# Altium PCB PCB5.PcbDoc (part 2 of 4)
Units mil, origin at the board's own origin, x right, y up, seen from the top; angles counter-clockwise.
Board outline 1968.5 x 2362.2 mil, 4 copper layers (Top Layer, GND, VCC, Bottom Layer), stack 30.634 mil thick; 134 components, 248 nets, 1063 pads, 694 vias.
Unrouted connection lines stored in the file: 163.
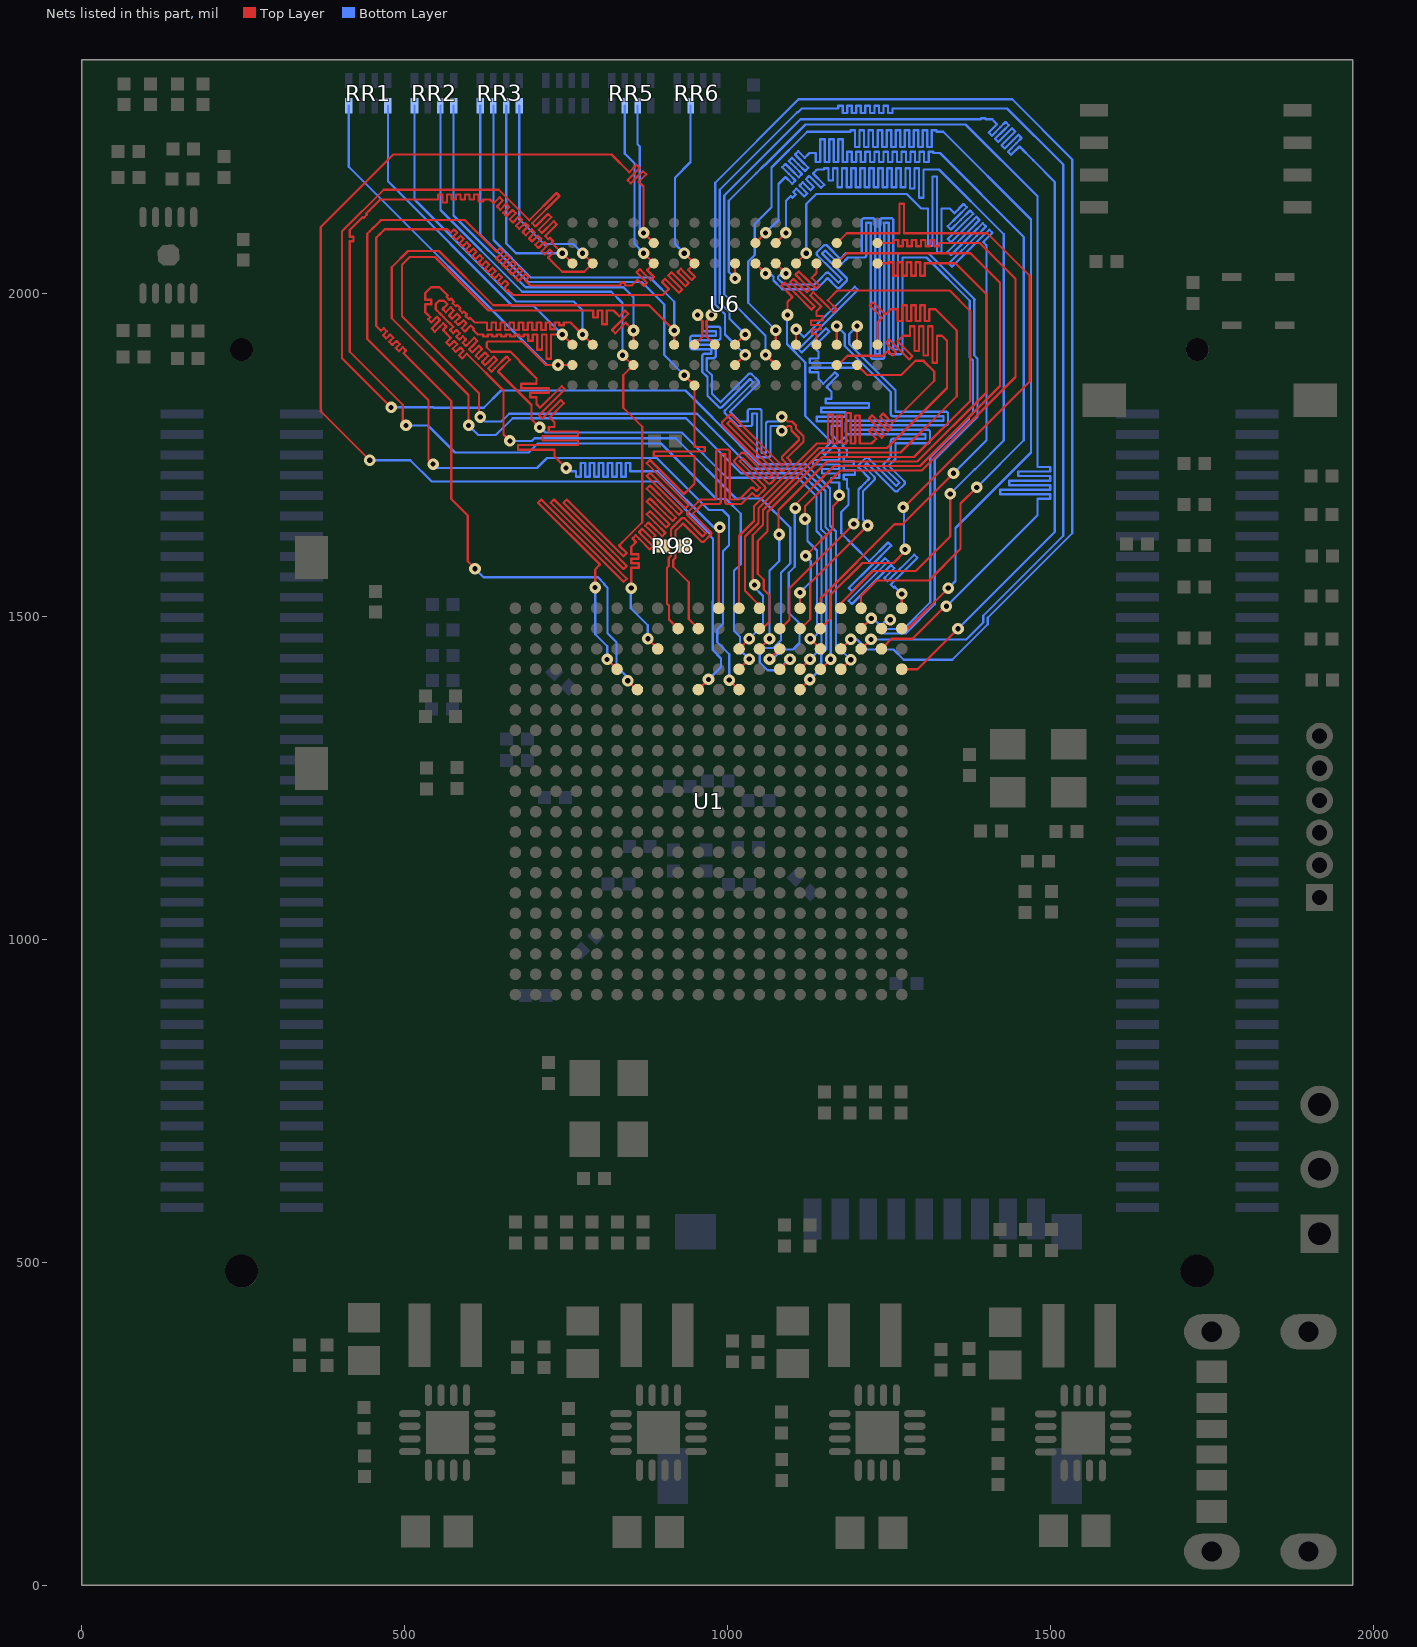
[diagram p4: the nets of this part, all layers, seen from the top]

## Via types
v1: diameter 18, hole 8, Top Layer to Bottom Layer, tented both sides, 692 vias
v2: diameter 40, hole 20, Top Layer to Bottom Layer, tented both sides, 2 vias

## Nets (pads, with @x,y where several pads share a name; then routed paths per layer and width w, separated by ;. In a path a pad name is that pad's centre, name@x,y a point inside that pad or via, vN(x,y) a via of type N, cw(c..) or ccw(c..) an arc to the next point about the centre after c; other vN are vias at no path point) (continued)
ADDR3-A8: RR1.8 U1.K1 U6.T8 | length 2210
  Top Layer w3.5: v1(750,1730) 741,1739 738.53,1741.47 733.58,1746.42 732,1748 732,1751.5 732,1758.5 675.68,1758.5 675.68,1765.5 732,1765.5 768.53,1765.5 768.53,1772.5 732,1772.5 713.56,1772.5 713.56,1779.5 732,1779.5 768.53,1779.5 768.53,1786.5 732,1786.5 723.25,1786.5 723.25,1793.5 732,1793.5 732,1800.5 732,1801 729.53,1803.47 724.58,1808.42 746.56,1830.41 741.61,1835.36 719.63,1813.37 712.94,1806.69 707.99,1811.64 714.68,1818.32 748.2,1851.85 743.25,1856.8 709.73,1823.27 704.78,1828.22 704,1829 704,1832.5 704,1839.5 694.4,1839.5 694.4,1846.5 704,1846.5 723.05,1846.5 723.05,1853.5 704,1853.5 680.4,1853.5 680.4,1860.5 704,1860.5 704,1867.5 704,1869 701.53,1871.47 696.58,1876.42 696.5,1876.5 678,1895 678,1896 664,1910 634,1910 627,1917 627,1923.95 629.05,1926 682,1926 718.49,1889.51 v1(737.51,1889.51) U6.T8@759.78,1889.51 ; U1.K1@986.45,1512.85 986.45,1636.45 v1(988,1638)
  Bottom Layer w3.5: RR1.8@413.37,2291 413.37,2196.63 720.49,1889.51 v1(737.51,1889.51) ; v1(750,1730) 755,1725 758.5,1725 765.5,1725 765.5,1716.52 772.5,1716.52 772.5,1725 772.5,1737.98 779.5,1737.98 779.5,1725 779.5,1716.52 786.5,1716.52 786.5,1725 786.5,1737.98 793.5,1737.98 793.5,1725 793.5,1716.52 800.5,1716.52 800.5,1725 800.5,1737.98 807.5,1737.98 807.5,1725 807.5,1716.52 814.5,1716.52 814.5,1725 814.5,1737.98 821.5,1737.98 821.5,1725 821.5,1716.52 828.5,1716.52 828.5,1725 828.5,1737.98 835.5,1737.98 835.5,1725 835.5,1716.52 842.5,1716.52 842.5,1725 842.5,1737.98 849.5,1737.98 849.5,1725 892,1725 979,1638 v1(988,1638)
ADDR3-A9: RR3.5 U1.J4 U6.R3 | length 2291.2
  Top Layer w3.5: v1(502,1796) 501,1796 497,1800 497,1828 415,1910 415,2081.2 420.68,2081.2 420.68,2088.2 415,2088.2 415,2095.2 415,2098.7 435.07,2118.78 436.5,2117.35 441.45,2122.3 440.02,2123.73 444.97,2128.68 449.92,2133.63 454.87,2138.58 459.82,2143.53 462.3,2146 551.5,2146 551.5,2153.68 558.5,2153.68 558.5,2146 558.5,2141.32 565.5,2141.32 565.5,2146 565.5,2153.68 572.5,2153.68 572.5,2146 579.5,2146 579.5,2153.68 586.5,2153.68 586.5,2146 593.5,2146 593.5,2153.68 600.5,2153.68 600.5,2146 607.5,2146 607.5,2153.68 614.5,2153.68 614.5,2146 614.5,2142.89 621.5,2142.89 621.5,2146 628.5,2146 632,2146 632.98,2145.02 637.93,2140.07 647.14,2149.28 652.09,2144.33 642.88,2135.12 647.83,2130.17 657.04,2139.38 661.99,2134.43 652.78,2125.22 657.73,2120.27 666.94,2129.48 671.89,2124.53 662.68,2115.32 667.63,2110.37 676.84,2119.58 681.79,2114.63 672.58,2105.42 677.53,2100.47 686.74,2109.68 691.69,2104.73 682.48,2095.52 687.43,2090.57 696.64,2099.78 701.59,2094.83 692.38,2085.62 697.33,2080.67 706.54,2089.88 711.49,2084.93 702.28,2075.72 707.23,2070.77 716.44,2079.98 721.39,2075.03 712.18,2065.82 717.13,2060.87 724.63,2068.38 729.58,2063.43 722.08,2055.92 727.03,2050.97 729.5,2048.5 744,2034 744,2033.87 778.15,2033.87 U6.R3@791.28,2046.99 v1(775.53,2062.74) ; U1.J4@1017.85,1418.35 v1(1033.6,1434.1)
  Bottom Layer w3.5: v1(502,1796) 536,1796 578,1754 692,1754 706,1768 897,1768 983,1682 997.7,1682 1020.35,1659.35 1020.35,1581.15 1010,1570.8 1010,1478 1019.35,1468.65 1019.35,1448.35 v1(1033.6,1434.1) ; RR3.5@677.6,2291 677.6,2115.4 717.01,2075.99 718.01,2076.99 761.28,2076.99 v1(775.53,2062.74)
ADDR3-A10: RR3.7 U1.F5 U6.L7 | length 2323.6
  Top Layer w3.5: v1(599,1796) 599,1843 480,1962 480,2041 505,2066 553,2066 637,1982 878.55,1982 v1(917.45,1943.1) U6.L7@917.45,1920.83 ; U1.F5@1111.85,1386.65 v1(1127.6,1402.4)
  Bottom Layer w3.5: v1(599,1796) 614,1781 641,1781 667.25,1807.25 935.75,1807.25 1021,1722 1114.1,1722 1144.75,1691.35 1144.75,1635.3 1152.75,1627.3 1152.75,1448.85 1145,1441.1 1145,1419.8 v1(1127.6,1402.4) ; v1@599,1796.75 v1@599.38,1796.38 ; RR3.7@637.44,2291 637.44,2083 695.44,2025 880,2025 917.45,1987.55 v1(917.45,1943.1)
ADDR3-A11: RR2.8 U1.G4 U6.R7 | length 2260.8
  Top Layer w3.5: v1(663,1772) 653,1782 653,1850 596.17,1906.83 589.13,1899.78 584.18,1904.73 591.22,1911.78 586.27,1916.73 579.23,1909.68 574.28,1914.63 581.32,1921.68 576.37,1926.63 569.33,1919.58 564.38,1924.53 571.42,1931.58 566.47,1936.53 564,1939 563.62,1939.38 559.22,1943.78 564.77,1949.33 559.83,1954.28 554.27,1948.73 546.72,1941.17 541.77,1946.12 549.32,1953.68 554.88,1959.23 549.93,1964.18 544.37,1958.63 541.32,1955.57 536.37,1960.52 539.42,1963.58 534.47,1968.53 532,1971 532,1976.5 532,1983.5 541,1983.5 541,1990.5 532,1990.5 532,1997.5 532,2001 533.58,2002.58 538.53,2007.53 541,2010 543.5,2010 550.5,2010 554,2010 556.74,2007.26 561.69,2002.31 566.64,1997.36 564.59,1995.31 569.54,1990.36 571.59,1992.41 576.54,1987.46 574.49,1985.41 579.44,1980.46 581.49,1982.51 586.44,1977.56 584.39,1975.51 589.34,1970.56 591.39,1972.61 596.34,1967.66 594.29,1965.61 599.24,1960.66 601.29,1962.71 606.24,1957.76 608.72,1955.28 613.5,1955.28 620.5,1955.28 627.5,1955.28 627.5,1943.76 634.5,1943.76 634.5,1955.28 641.5,1955.28 641.5,1943.76 648.5,1943.76 648.5,1955.28 655.5,1955.28 655.5,1943.76 662.5,1943.76 662.5,1955.28 669.5,1955.28 669.5,1943.76 676.5,1943.76 676.5,1955.28 683.5,1955.28 683.5,1943.76 690.5,1943.76 690.5,1955.28 697.5,1955.28 697.5,1943.76 704.5,1943.76 704.5,1955.28 711.5,1955.28 711.5,1943.76 718.5,1943.76 718.5,1955.28 725.5,1955.28 725.5,1945.13 732.5,1945.13 732.5,1955.28 739.5,1955.28 739.5,1951.01 746.5,1951.01 746.5,1955.28 753.5,1955.28 757,1955.28 758.84,1953.45 763.79,1948.5 766.26,1946.02 v1(775.53,1936.76) U6.R7@791.28,1921.01 ; U1.G4@1081,1418 v1(1096.75,1433.75)
  Bottom Layer w3.5: RR2.8@515.17,2291 515.17,2145.83 673,1988 762,1988 775.53,1974.47 v1(775.53,1936.76) ; v1(663,1772) 697,1772 701,1776 920,1776 1013,1683 1052,1683 1097,1638 1097,1582 1082.95,1567.95 1082.95,1463.3 1071,1451.35 1056.35,1451.35 1050,1445 1050,1429.05 1062.05,1417 1078,1417 1094.75,1433.75 v1(1096.75,1433.75)
ADDR3-A12: RR2.5 U1.E4 U6.N7 | length 2285.4
  Top Layer w3.5: v1(617,1809) 615,1811 615,1846 496,1965 496,2045 508,2057 547,2057 630,1974 792.06,1974 792.06,1963.16 799.06,1963.16 799.06,1974 806.06,1974 806.06,1952.55 813.06,1952.55 813.06,1974 820.06,1974 823.56,1974 827.46,1970.1 832.41,1965.15 841.16,1973.91 846.11,1968.96 837.36,1960.2 821.03,1943.88 825.98,1938.93 842.31,1955.26 844.78,1952.78 v1(854.46,1943.1) U6.N7@854.46,1920.83 ; U1.E4@1144,1418 v1(1159.75,1433.75)
  Bottom Layer w3.5: RR2.5@575.8,2291 575.8,2121.2 687,2010 839,2010 854.46,1994.54 v1(854.46,1943.1) ; v1(617,1809) 624,1802 649.75,1802 662,1814.25 952.75,1814.25 1038,1729 1117,1729 1151.75,1694.25 1151.75,1638.2 1159.75,1630.2 v1(1159.75,1433.75)
ADDR3-A13: RR3.6 U1.D4 U6.T3 | length 2328.7
  Top Layer w3.5: v1(479,1824) 403,1900 403,2096.6 467.4,2161 645.77,2161 692.81,2113.96 734.96,2156.11 739.91,2151.16 697.76,2109.01 702.71,2104.06 722.11,2123.46 727.06,2118.51 707.66,2099.11 712.61,2094.16 730.76,2112.3 735.71,2107.35 717.56,2089.21 722.51,2084.26 724.96,2086.71 729.91,2081.76 727.46,2079.31 732.41,2074.36 734.89,2071.89 v1(744.03,2062.74) U6.T3@759.78,2046.99 ; U1.D4@1175.05,1417.35 v1(1190.8,1433.1)
  Bottom Layer w3.5: v1(479,1824) 544.25,1824 545,1823.25 622.49,1823.25 649.23,1849.99 849.84,1849.99 850.1,1850.25 891.41,1850.25 891.67,1849.99 935.01,1849.99 1018.75,1766.25 1018.75,1765.51 1048.26,1736 1121,1736 1158.75,1698.25 1158.75,1641.1 1168,1631.85 1168,1455.9 v1(1190.8,1433.1) ; RR3.6@657.13,2291 657.13,2077.87 672.26,2062.74 v1(744.03,2062.74)
ADDR3-A14: RR1.5 U1.F4 U6.T7 | length 2232.6
  Top Layer w3.5: v1(709,1793) 696.5,1805.5 696.5,1827.5 651.5,1872.5 644.52,1879.48 662.65,1897.61 657.7,1902.56 639.57,1884.43 634.46,1879.32 629.51,1884.27 634.62,1889.38 642.85,1897.61 637.9,1902.56 629.67,1894.33 624.56,1889.22 619.61,1894.17 624.72,1899.28 629.33,1903.89 624.38,1908.84 619.77,1904.23 614.66,1899.12 609.71,1904.07 614.82,1909.18 619.94,1914.3 614.99,1919.25 609.87,1914.13 604.76,1909.02 599.81,1913.97 604.92,1919.08 612.53,1926.69 607.59,1931.64 599.97,1924.03 594.86,1918.92 589.91,1923.86 595.02,1928.98 590.07,1933.93 584.96,1928.81 580.01,1933.76 585.12,1938.88 580.17,1943.83 575.06,1938.71 570.11,1943.66 575.22,1948.78 570.27,1953.73 565.32,1958.68 560.37,1963.63 555.42,1968.58 550.47,1973.53 548,1976 548,1984 553,1989 561,1989 561.27,1988.73 566.22,1983.78 558.61,1976.17 563.56,1971.22 571.17,1978.83 576.12,1973.88 568.51,1966.27 573.46,1961.32 581.07,1968.93 586.02,1963.98 578.41,1956.37 583.36,1951.42 590.97,1959.03 595.92,1954.08 588.31,1946.47 593.25,1941.52 600.87,1949.13 602.48,1950.74 607.43,1945.8 605.82,1944.18 610.77,1939.23 613.24,1936.76 614.5,1936.76 621.5,1936.76 621.5,1933.6 628.5,1933.6 628.5,1936.76 635.5,1936.76 635.5,1933.62 642.5,1933.62 642.5,1936.76 649.5,1936.76 649.5,1933.62 656.5,1933.62 656.5,1936.76 663.5,1936.76 663.5,1933.62 670.5,1933.62 670.5,1936.76 677.5,1936.76 677.5,1933.62 684.5,1933.62 684.5,1936.76 691.5,1936.76 691.5,1927.02 698.5,1927.02 698.5,1936.76 705.5,1936.76 705.5,1913.02 712.5,1913.02 712.5,1936.76 719.5,1936.76 719.5,1899.18 726.5,1899.18 726.5,1936.76 730,1936.76 v1(744.03,1936.76) U6.T7@759.78,1921.01 ; U1.F4@1112,1418 v1(1127.75,1433.75)
  Bottom Layer w3.5: RR1.5@474,2291 474,2174 667,1981 699.79,1981 v1(744.03,1936.76) ; v1(709,1793) 710,1793 718,1785 929,1785 999,1715 1109,1715 1137.75,1686.25 1137.75,1632.4 1145.75,1624.4 1145.75,1451.75 v1(1127.75,1433.75)
ADDR3-BA0: RR5.6 U1.L5 U6.M2 | length 2175.9
  Top Layer w3.5: v1(446,1742) 370,1818 370,2103.2 482.3,2215.5 820.5,2215.5 847.74,2188.26 859.21,2199.73 864.16,2194.78 852.69,2183.31 845.25,2175.87 850.2,2170.92 857.64,2178.36 869.11,2189.83 874.06,2184.88 862.59,2173.41 867.54,2168.46 870.01,2165.99 v1(870.01,2094.24) U6.M2@885.76,2078.49 ; U1.L5@954.85,1386.85 v1(970.6,1402.6)
  Bottom Layer w3.5: v1@446,1742.25 508.75,1742.25 542,1709 892,1709 973.75,1627.25 973.75,1624.51 977.7,1620.56 977.7,1524.87 977,1524.17 977,1448 990,1435 990,1421.8 v1@972.2,1404 ; RR5.6@860.73,2291 860.73,2231.27 864,2228 864,2100.25 v1(870.01,2094.24)
ADDR3-BA1: RR2.6 U1.R4 U6.N8 | length 2055.6
  Top Layer w3.5: v1(795,1545) 795,1559 795,1562.5 795,1569.5 795,1573 797.47,1575.47 802.42,1580.42 706.53,1676.31 711.48,1681.26 807.37,1585.37 839.05,1553.69 844,1558.64 812.32,1590.32 726.33,1676.31 731.28,1681.26 817.27,1595.27 839.05,1573.49 844,1578.44 822.22,1600.22 746.13,1676.31 751.08,1681.26 827.17,1605.17 839.05,1593.29 844,1598.24 832.12,1610.12 837.07,1615.07 868,1646 868,1794 838.52,1823.48 838.52,1828 838.52,1873.76 U6.N8@854.27,1889.51 ; v1(813.6,1433.6) U1.R4@829.35,1417.85 ; v1(837.52,1904.76) U6.N8@853.27,1889.01
  Bottom Layer w3.5: RR2.6@555.33,2291 555.33,2129.67 682,2003 820,2003 837.52,1985.48 v1(837.52,1904.76) ; v1(795,1545) 795,1472.45 813.6,1453.85 v1(813.6,1433.6)
ADDR3-BA2: RR5.7 U1.J5 U6.M3 | length 2191.6
  Top Layer w3.5: v1(544,1736) 537,1743 537,1835 442,1930 442,2021 442,2026.2 442,2033.2 442,2040.2 442,2047.2 442,2054.2 442,2061.2 442,2068.2 442,2075.2 442,2082.2 442,2089.2 442,2092.7 445.98,2096.68 450.93,2101.63 455.88,2106.58 460.83,2111.53 463.3,2114 463.5,2114 470.5,2114 477.5,2114 484.5,2114 491.5,2114 498.5,2114 505.5,2114 512.5,2114 519.5,2114 526.5,2114 533.5,2114 540.5,2114 547.5,2114 554.5,2114 561.5,2114 568.5,2114 575.5,2114 582.5,2114 589.5,2114 593,2114 642.16,2064.84 647.71,2070.39 652.66,2065.44 647.11,2059.89 641.56,2054.34 646.51,2049.39 652.06,2054.94 657.61,2060.49 662.56,2055.54 657.01,2049.99 651.46,2044.44 656.41,2039.49 661.96,2045.04 667.51,2050.59 672.46,2045.64 666.91,2040.09 661.36,2034.54 666.31,2029.59 671.86,2035.14 677.41,2040.69 682.36,2035.74 676.81,2030.19 671.26,2024.64 676.21,2019.69 681.76,2025.24 687.31,2030.79 692.26,2025.84 686.71,2020.29 691.66,2015.34 694.13,2012.87 701.14,2012.87 708.14,2012.87 715.14,2012.87 722.14,2012.87 729.14,2012.87 736.14,2012.87 743.14,2012.87 750.14,2012.87 757.14,2012.87 764.14,2012.87 771.14,2012.87 778.14,2012.87 785.14,2012.87 792.14,2012.87 799.14,2012.87 806.14,2012.87 813.14,2012.87 820.14,2012.87 827.14,2012.87 834.14,2012.87 834.14,2016.97 841.14,2016.97 841.14,2012.87 848.14,2012.87 851.64,2012.87 855.61,2016.84 860.56,2021.79 870.35,2012 875.3,2016.95 865.51,2026.74 859.04,2033.21 863.99,2038.16 870.46,2031.69 881.26,2020.89 886.21,2025.84 875.41,2036.64 877.89,2039.11 U6.M3@885.76,2046.99 v1(870.01,2062.74) ; v1(1002.6,1401.6) U1.J5@1018.35,1385.85
  Bottom Layer w3.5: v1(544,1736) 550,1730 705,1730 720.5,1745.5 890.24,1745.5 970.87,1664.87 992.23,1664.87 1002.25,1654.85 1002.25,1610.25 993,1601 993,1489 984,1480 984,1460 1002.6,1441.4 v1(1002.6,1401.6) ; RR5.7@841.04,2291 841.04,2216.96 855.76,2202.24 855.76,2077.24 870.01,2062.99 v1(870.01,2062.74)
ADDR3-CAS: RR6.7 U1.P5 U6.K3 | length 2202.8
  Top Layer w3.5: v1(609,1574) 597.5,1585.5 597.5,1656.5 572,1682 572,1834 498.07,1907.93 502.12,1911.97 497.17,1916.92 493.12,1912.88 491.08,1910.83 486.13,1915.78 488.17,1917.83 492.22,1921.87 487.27,1926.82 483.22,1922.78 481.18,1920.73 476.23,1925.68 478.27,1927.73 482.32,1931.77 477.37,1936.72 473.32,1932.68 471.28,1930.63 466.33,1935.58 468.37,1937.63 472.42,1941.67 467.47,1946.62 463.42,1942.58 458.47,1947.53 456,1950 456,1950.4 456,1957.4 456,1964.4 456,1971.4 456,1978.4 456,1985.4 456,1992.4 456,1999.4 456,2006.4 456,2013.4 456,2020.4 456,2027.4 456,2034.4 456,2041.4 456,2048.4 456,2055.4 456,2062.4 456,2069.4 456,2076.4 456,2083.4 456,2086.9 456.73,2087.63 461.68,2092.58 466.63,2097.53 469.1,2100 471.5,2100 478.5,2100 485.5,2100 492.5,2100 499.5,2100 506.5,2100 513.5,2100 520.5,2100 527.5,2100 534.5,2100 541.5,2100 548.5,2100 555.5,2100 562.5,2100 566,2100 566.53,2099.47 571.48,2094.52 576.53,2099.57 581.48,2094.62 576.43,2089.57 574.88,2088.02 579.83,2083.07 581.38,2084.62 586.43,2089.67 591.38,2084.72 586.33,2079.67 584.78,2078.12 589.73,2073.18 591.28,2074.72 596.33,2079.77 601.27,2074.82 596.23,2069.77 594.68,2068.23 599.63,2063.28 601.18,2064.82 606.22,2069.87 611.17,2064.92 606.13,2059.87 604.58,2058.33 609.53,2053.38 611.08,2054.92 616.12,2059.97 621.07,2055.02 616.03,2049.97 614.48,2048.43 619.43,2043.48 620.98,2045.02 626.02,2050.07 630.97,2045.12 625.93,2040.07 624.38,2038.53 629.33,2033.58 630.88,2035.12 635.92,2040.17 640.87,2035.22 635.83,2030.17 634.28,2028.63 639.23,2023.68 640.78,2025.22 645.82,2030.27 650.77,2025.32 645.73,2020.27 644.18,2018.73 649.13,2013.78 650.68,2015.32 655.72,2020.37 660.67,2015.42 655.63,2010.37 654.08,2008.83 659.03,2003.88 660.58,2005.42 665.53,2000.47 668,1998 672.26,1998 679.26,1998 686.26,1998 693.26,1998 700.26,1998 707.26,1998 714.26,1998 721.26,1998 728.26,1998 735.26,1998 742.26,1998 749.26,1998 756.26,1998 763.26,1998 770.26,1998 777.26,1998 784.26,1998 791.26,1998 798.26,1998 805.26,1998 812.26,1998 819.26,1998 826.26,1998 833.26,1998 840.26,1998 847.26,1998 854.26,1998 861.26,1998 868.26,1998 875.26,1998 882.26,1998 889.26,1998 896.26,1998 899.76,1998 904.26,2002.49 909.21,2007.44 898.41,2018.24 903.36,2023.19 914.16,2012.39 924.95,2001.6 929.9,2006.55 919.11,2017.34 908.31,2028.14 913.26,2033.09 924.06,2022.29 934.85,2011.5 939.8,2016.45 929.01,2027.24 922.54,2033.71 927.49,2038.66 933.96,2032.19 944.75,2021.4 949.7,2026.35 938.91,2037.14 941.38,2039.62 U6.K3@948.76,2046.99 v1(933.01,2062.74) ; v1(845.6,1400.6) U1.P5@861.35,1384.85
  Bottom Layer w3.5: v1(609,1574) 622.25,1560.75 799.4,1560.75 809.25,1550.91 809.25,1549.49 814,1544.74 814,1474 828,1460 828,1423 845.6,1405.4 v1(845.6,1400.6) ; v1(933.01,2062.74) 918.76,2076.99 918.76,2179.76 942.84,2203.84 RR6.7@942.84,2291
ADDR3-CKE0: RR3.8 U1.N3 U6.K9 | length 2112.3
  Top Layer w3.5: v1(851,1544) 851,1565 851,1568.5 851,1575.5 862.48,1575.5 862.48,1582.5 851,1582.5 851,1589.5 861.97,1589.5 861.97,1596.5 851,1596.5 851,1603.5 851,1608 853.47,1610.47 858.42,1615.42 852.87,1620.98 857.82,1625.93 863.37,1620.37 879.75,1604 884.7,1608.95 868.32,1625.32 862.77,1630.88 867.72,1635.83 873.27,1630.27 883.51,1620.03 888.46,1624.98 878.22,1635.22 872.67,1640.77 877.62,1645.72 883.17,1640.17 899.06,1624.29 904.01,1629.24 888.12,1645.12 875,1658.25 879.95,1663.2 893.07,1650.07 905.15,1638 910.1,1642.95 898.02,1655.02 875,1678.05 879.95,1683 902.97,1659.97 915.05,1647.9 920,1652.85 907.92,1664.92 875,1697.85 879.95,1702.8 912.87,1669.87 925.04,1657.7 929.99,1662.65 917.82,1674.82 875,1717.64 879.95,1722.59 922.77,1679.77 934.85,1667.69 939.8,1672.64 927.72,1684.72 875,1737.44 879.95,1742.39 932.67,1689.67 933.5,1690.5 939.5,1696.5 948.76,1705.76 948.76,1709 948.76,1723.5 948.76,1727 948.76,1734 948.76,1738 948.76,1741.5 948.76,1748.5 885.87,1748.5 885.87,1755.5 948.76,1755.5 964.6,1755.5 964.6,1762.5 948.76,1762.5 948.76,1807 U6.K9@948.76,1858.02 v1(933.01,1873.77) ; v1(876.6,1465.6) U1.N3@892.35,1449.85
  Bottom Layer w3.5: RR3.8@616.97,2291 616.97,2092.03 691,2018 867,2018 901.89,1983.11 901.89,1904.89 v1(933.01,1873.77) ; v1(851,1544) 850,1543 850,1513 876.6,1486.4 v1(876.6,1465.6)
ADDR3-CLK0_N: R98.2 U1.M2 U6.K7 | length 1746.2
  Top Layer w3.5: U1.M2@923.45,1481.35 909.2,1495.6 909.2,1517 906.2,1520 906.2,1575.6 909.12,1578.53 909.12,1590.64 912.62,1594.14 912.62,1598.66 910.57,1600.71 908.27,1600.71 R98.2@899.98,1609 908.27,1617.29 910.57,1617.29 912.62,1619.34 912.62,1635.57 928.71,1651.66 cw(c931.19,1649.19) 933.66,1651.66 961.36,1623.96 966.31,1628.91 938.61,1656.61 cw(c941.09,1659.09) 938.61,1661.56 948.51,1671.46 958.26,1681.21 982.46,1681.21 982.46,1755.07 cw(c985.96,1755.07) 985.96,1758.57 999.96,1758.57 cw(c999.96,1755.07) 1003.46,1755.07 1003.46,1681.21 1018.21,1681.21 1025.85,1688.85 1035.74,1698.74 cw(c1038.22,1696.27) 1040.69,1698.75 1044.98,1694.47 1049.93,1699.42 1011.49,1737.86 cw(c1013.96,1740.34) 1011.48,1742.81 1021.38,1752.71 cw(c1023.86,1750.23) 1026.33,1752.71 1064.77,1714.27 1069.72,1719.22 992.32,1796.63 cw(c994.79,1799.11) 992.31,1801.58 1002.21,1811.48 cw(c1004.69,1809) 1007.16,1811.48 1080.29,1738.35 1084.57,1734.07 1089.52,1739.02 1085.25,1743.29 cw(c1087.72,1745.77) 1085.24,1748.24 1110.55,1773.55 1110.55,1776.45 1098.95,1788.05 1098.95,1792.95 1096.9,1795 1093.3,1795 1086.05,1787.75 v1(1084,1787.75) ; U6.K7@948.76,1921.01 961,1933.26 961,1957.7 953.75,1964.95 v1(953.75,1967)
  Bottom Layer w3.5: v1(953.75,1967) 953.75,1964.95 961,1957.7 961,1945.45 ccw(c964.5,1945.45) 964.5,1941.95 982,1941.95 982,1934.95 945.91,1934.95 ccw(c945.91,1931.45) 942.41,1931.45 942.41,1917.45 ccw(c945.91,1917.45) 945.91,1913.95 974.75,1913.95 974.75,1906.95 964.5,1906.95 ccw(c964.5,1903.45) 961,1903.45 961,1878.71 968.86,1870.86 968.86,1842.14 986.51,1824.49 ccw(c988.99,1826.96) 991.46,1824.48 1034.96,1867.98 1039.91,1863.03 996.42,1819.54 ccw(c998.89,1817.06) 996.41,1814.59 1006.31,1804.69 1016,1795 1035,1795 ccw(c1035,1798.5) 1038.5,1798.5 1038.5,1814.49 1045.5,1814.49 1045.5,1750.11 ccw(c1049,1750.11) 1049,1746.61 1063,1746.61 ccw(c1063,1750.11) 1066.5,1750.11 1066.5,1795 1081.95,1795 1081.95,1789.8 v1(1084,1787.75)
ADDR3-CLK0_P: R98.1 U1.L2 U6.J7 | length 1753.8
  Top Layer w3.5: U1.L2@954.85,1481.35 940,1496.2 940,1553.15 916.12,1577.03 916.12,1587.74 919.62,1591.24 919.62,1598.66 921.67,1600.71 923.98,1600.71 R98.1@932.27,1609 923.98,1617.29 921.67,1617.29 919.62,1619.34 919.62,1632.67 927.47,1640.52 931.19,1644.24 958.88,1616.54 ccw(c961.36,1619.01) 963.83,1616.53 973.73,1626.43 ccw(c971.26,1628.91) 974.76,1628.91 ccw(c971.26,1628.91) 973.74,1631.38 946.03,1659.09 953.46,1666.51 961.16,1674.21 985.96,1674.21 ccw(c985.96,1677.71) 989.46,1677.71 989.46,1751.57 996.46,1751.57 996.46,1677.71 ccw(c999.96,1677.71) 999.96,1674.21 1021.11,1674.21 1030.79,1683.9 1038.22,1691.32 1042.5,1687.05 ccw(c1044.98,1689.52) 1047.45,1687.04 1057.35,1696.94 ccw(c1054.87,1699.42) 1058.37,1699.42 ccw(c1054.87,1699.42) 1057.35,1701.89 1018.91,1740.34 1023.86,1745.29 1062.3,1706.85 ccw(c1064.77,1709.32) 1067.25,1706.84 1077.15,1716.74 ccw(c1074.67,1719.22) 1078.17,1719.22 ccw(c1074.67,1719.22) 1077.15,1721.69 999.74,1799.11 1004.69,1804.06 1075.34,1733.4 1082.09,1726.65 ccw(c1084.57,1729.12) 1087.04,1726.64 1096.94,1736.54 ccw(c1094.47,1739.02) 1097.97,1739.02 ccw(c1094.47,1739.02) 1096.95,1741.49 1092.67,1745.77 1117.55,1770.65 1117.55,1779.35 1105.95,1790.95 1105.95,1795.85 1099.8,1802 1093.3,1802 1086.05,1809.25 v1(1084,1809.25) ; v1(975.25,1967) 975.25,1964.95 968,1957.7 968,1933.26 U6.J7@980.25,1921.01
  Bottom Layer w3.5: v1(975.25,1967) 975.25,1964.95 968,1957.7 968,1948.95 985.5,1948.95 cw(c985.5,1945.45) 989,1945.45 989,1931.45 cw(c985.5,1931.45) 985.5,1927.95 949.41,1927.95 949.41,1920.95 978.25,1920.95 cw(c978.25,1917.45) 981.75,1917.45 981.75,1903.45 cw(c978.25,1903.45) 978.25,1899.95 968,1899.95 968,1881.61 975.86,1873.76 975.86,1845.04 988.99,1831.91 1032.48,1875.4 cw(c1034.96,1872.93) 1037.43,1875.41 1047.33,1865.51 cw(c1044.86,1863.03) 1048.36,1863.03 cw(c1044.86,1863.03) 1047.34,1860.56 1003.84,1817.06 1011.26,1809.64 1018.9,1802 1031.5,1802 1031.5,1817.99 cw(c1035,1817.99) 1035,1821.49 1049,1821.49 cw(c1049,1817.99) 1052.5,1817.99 1052.5,1753.61 1059.5,1753.61 1059.5,1798.5 cw(c1063,1798.5) 1063,1802 1081.95,1802 1081.95,1807.2 v1(1084,1809.25)
ADDR3-D0: U1.C3 U6.H7 | length 1984.8
  Top Layer w3.5: U6.H7@1011.75,1921.01 v1(1027.5,1936.76) ; U1.C3@1206.55,1448.85 v1(1222.3,1464.6)
  Bottom Layer w3.5: v1(1027.5,1936.76) 1003,1961.26 1003,1971.1 988,1986.1 988,2161 1108,2281 1109,2281 1115,2287 1168,2287 1171.5,2287 1171.5,2291.1 1178.5,2291.1 1178.5,2287 1178.5,2279.91 1185.5,2279.91 1185.5,2287 1185.5,2291.1 1192.5,2291.1 1192.5,2287 1192.5,2279.91 1199.5,2279.91 1199.5,2287 1199.5,2291.1 1206.5,2291.1 1206.5,2287 1206.5,2279.91 1213.5,2279.91 1213.5,2287 1213.5,2291.1 1220.5,2291.1 1220.5,2287 1220.5,2279.91 1227.5,2279.91 1227.5,2287 1227.5,2291.1 1234.5,2291.1 1234.5,2287 1234.5,2279.91 1241.5,2279.91 1241.5,2287 1241.5,2291.1 1248.5,2291.1 1248.5,2287 1248.5,2279.91 1255.5,2279.91 1255.5,2287 1433,2287 1520,2200 1520,2196 1520,1625.26 1396,1501.26 1396,1490.9 1369.7,1464.6 v1(1222.3,1464.6)
ADDR3-D1: U1.B3 U6.H3 | length 1963.7
  Top Layer w3.5: v1(1011.75,2023.75) U6.H3@1011.75,2046.99 ; U1.B3@1238.35,1449.85 1254.1,1465.6 1286.6,1465.6 1337,1516 v1(1339,1516)
  Bottom Layer w3.5: v1(1011.75,2023.75) 1002,2033.5 1002,2144 1044.5,2186.5 1057.47,2199.47 1058,2199.47 1120.77,2262.23 1368.77,2262.23 1480,2151 1480,1735 1480,1731.5 1500,1731.5 1500,1724.5 1480,1724.5 1450.4,1724.5 1450.4,1717.5 1480,1717.5 1500,1717.5 1500,1710.5 1480,1710.5 1436.4,1710.5 1436.4,1703.5 1480,1703.5 1500,1703.5 1500,1696.5 1480,1696.5 1422.4,1696.5 1422.4,1689.5 1480,1689.5 1500,1689.5 1500,1682.5 1480,1682.5 1480,1676 1480,1657 v1(1339,1516)
ADDR3-D2: U1.A2 U6.F7 | length 1983.9
  Top Layer w3.5: U6.F7@1074.74,1921.01 v1(1074.74,1943.28) ; U1.A2@1269.85,1481.35 1279.35,1481.35 v1(1342,1544)
  Bottom Layer w3.5: v1(1074.74,1943.28) 1032,1986.02 1032,2050 1042,2060 1042,2108 1068,2134 1068,2195.33 1123.67,2251 1190.5,2251 1190.5,2253.15 1197.5,2253.15 1197.5,2251 1197.5,2227.09 1204.5,2227.09 1204.5,2251 1204.5,2253.15 1211.5,2253.15 1211.5,2251 1211.5,2227.09 1218.5,2227.09 1218.5,2251 1218.5,2253.15 1225.5,2253.15 1225.5,2251 1225.5,2227.09 1232.5,2227.09 1232.5,2251 1232.5,2253.15 1239.5,2253.15 1239.5,2251 1239.5,2227.09 1246.5,2227.09 1246.5,2251 1246.5,2253.15 1253.5,2253.15 1253.5,2251 1253.5,2227.09 1260.5,2227.09 1260.5,2251 1260.5,2253.15 1267.5,2253.15 1267.5,2251 1267.5,2227.09 1274.5,2227.09 1274.5,2251 1274.5,2253.15 1281.5,2253.15 1281.5,2251 1281.5,2227.09 1288.5,2227.09 1288.5,2251 1288.5,2253.15 1295.5,2253.15 1295.5,2251 1295.5,2227.09 1302.5,2227.09 1302.5,2251 1302.5,2253.15 1309.5,2253.15 1309.5,2251 1309.5,2227.09 1316.5,2227.09 1316.5,2251 1316.5,2253.15 1323.5,2253.15 1323.5,2251 1330.5,2251 1334,2251 1470,2115 1470,1754 1353,1637 1353,1555 v1(1342,1544)
ADDR3-D3: U1.A4 U6.F8 | length 1983.9
  Top Layer w3.5: v1(1058.99,1905.26) U6.F8@1074.74,1889.51 ; U1.A4@1269.85,1418.35 1294.35,1418.35 v1(1357,1481)
  Bottom Layer w3.5: v1(1058.99,1905.26) 1058.99,1935.01 995,1999 995,2152.02 1112.99,2270.01 1120.77,2270.01 1389,2270.01 1392.5,2270.01 1392.5,2271.76 1399.5,2271.76 1399.5,2270.01 1406.5,2270.01 1409.99,2270.01 1412.46,2267.54 1417.41,2262.59 1404.55,2249.72 1409.5,2244.77 1422.36,2257.64 1430.73,2266 1435.68,2261.05 1427.31,2252.69 1414.45,2239.82 1419.4,2234.87 1432.26,2247.74 1440.63,2256.1 1445.58,2251.15 1437.21,2242.79 1424.35,2229.92 1429.3,2224.97 1442.16,2237.84 1450.53,2246.2 1455.48,2241.26 1447.11,2232.89 1434.24,2220.02 1439.19,2215.07 1452.06,2227.94 1473.5,2206.5 1507,2173 1507,1775 1507,1631 v1(1357,1481)
ADDR3-D4: U1.D3 U6.H8 | length 1997.8
  Top Layer w3.5: U6.H8@1011.75,1889.51 v1(1027.5,1905.26) ; U1.D3@1175.05,1448.85 v1(1190.8,1464.6)
  Bottom Layer w3.5: v1(1027.5,1905.26) 996,1936.76 996,1968.2 981,1983.2 981,2172 1110,2301 1441,2301 1534,2208 1534,1629.15 1403,1498.15 1403,1488 1348,1433 1273,1433 1257,1449 1216,1449 1200.4,1464.6 v1(1190.8,1464.6)
ADDR3-D5: U1.D1 U6.F2 | length 1984.3
  Top Layer w3.5: U6.F2@1074.74,2078.49 v1(1090.49,2094.24) ; U1.D1@1175.35,1512.85 1175.35,1520.35 1225.5,1570.5 1291.5,1570.5 1345,1624 v1(1345,1690)
  Bottom Layer w3.5: v1(1090.49,2094.24) 1090.49,2144 1092.97,2146.47 1097.91,2151.42 1100.77,2148.57 1105.72,2153.52 1102.86,2156.37 1101.63,2157.61 1106.58,2162.56 1107.81,2161.32 1118.72,2150.42 1123.67,2155.37 1112.76,2166.27 1111.53,2167.51 1116.48,2172.46 1117.71,2171.22 1128.61,2160.32 1133.56,2165.27 1122.66,2176.17 1121.43,2177.41 1126.38,2182.36 1127.61,2181.12 1144.83,2163.9 1149.78,2168.85 1132.56,2186.07 1137.51,2191.02 1139,2192.51 1142.5,2192.51 1149.5,2192.51 1149.5,2194.26 1156.5,2194.26 1156.5,2192.51 1156.5,2175.42 1163.5,2175.42 1163.5,2192.51 1163.5,2194.26 1170.5,2194.26 1170.5,2192.51 1170.5,2164.9 1177.5,2164.9 1177.5,2192.51 1177.5,2194.26 1184.5,2194.26 1184.5,2192.51 1184.5,2164.9 1191.5,2164.9 1191.5,2192.51 1191.5,2194.26 1198.5,2194.26 1198.5,2192.51 1198.5,2164.9 1205.5,2164.9 1205.5,2192.51 1205.5,2194.26 1212.5,2194.26 1212.5,2192.51 1212.5,2164.9 1219.5,2164.9 1219.5,2192.51 1219.5,2194.26 1226.5,2194.26 1226.5,2192.51 1226.5,2164.9 1233.5,2164.9 1233.5,2192.51 1233.5,2194.26 1240.5,2194.26 1240.5,2192.51 1240.5,2164.9 1247.5,2164.9 1247.5,2192.51 1247.5,2194.26 1254.5,2194.26 1254.5,2192.51 1254.5,2164.9 1261.5,2164.9 1261.5,2192.51 1261.5,2194.26 1268.5,2194.26 1268.5,2192.51 1268.5,2164.9 1275.5,2164.9 1275.5,2192.51 1275.5,2194.26 1282.5,2194.26 1282.5,2192.51 1282.5,2162.79 1289.5,2162.79 1289.5,2192.51 1289.5,2194.26 1296.5,2194.26 1296.5,2192.51 1296.5,2148.79 1303.5,2148.79 1303.5,2192.51 1327.49,2192.51 1428,2092 1428,1772.49 1383.51,1728 1383,1728 v1(1345,1690)
ADDR3-D6: U1.C1 U6.G2 | length 1983.9
  Top Layer w3.5: U6.G2@1043.24,2078.49 v1(1058.99,2094.24) ; U1.C1@1206.85,1512.85 1206.85,1531.85 1231,1556 1312,1556 1361,1605 1361,1675 v1(1386,1700)
  Bottom Layer w3.5: v1(1058.99,2094.24) 1079,2114.24 1079,2170 1089.88,2180.88 1100.39,2170.36 1105.34,2175.31 1094.83,2185.83 1084.89,2195.76 1089.84,2200.71 1099.78,2190.78 1110.29,2180.26 1115.24,2185.21 1104.73,2195.73 1094.79,2205.66 1099.74,2210.61 1109.68,2200.68 1120.19,2190.16 1125.14,2195.11 1114.63,2205.63 1104.69,2215.56 1109.64,2220.51 1119.58,2210.58 1124.53,2215.53 1127,2218 1129.5,2218 1136.5,2218 1136.5,2204.15 1143.5,2204.15 1143.5,2218 1143.5,2239.36 1150.5,2239.36 1150.5,2218 1150.5,2204.15 1157.5,2204.15 1157.5,2218 1157.5,2239.36 1164.5,2239.36 1164.5,2218 1164.5,2204.15 1171.5,2204.15 1171.5,2218 1171.5,2239.36 1178.5,2239.36 1178.5,2218 1178.5,2204.15 1185.5,2204.15 1185.5,2218 1185.5,2219.75 1192.5,2219.75 1192.5,2218 1192.5,2204.15 1199.5,2204.15 1199.5,2218 1199.5,2219.75 1206.5,2219.75 1206.5,2218 1206.5,2204.15 1213.5,2204.15 1213.5,2218 1213.5,2219.75 1220.5,2219.75 1220.5,2218 1220.5,2204.15 1227.5,2204.15 1227.5,2218 1227.5,2219.75 1234.5,2219.75 1234.5,2218 1234.5,2204.15 1241.5,2204.15 1241.5,2218 1241.5,2219.75 1248.5,2219.75 1248.5,2218 1248.5,2204.15 1255.5,2204.15 1255.5,2218 1255.5,2219.75 1262.5,2219.75 1262.5,2218 1262.5,2204.15 1269.5,2204.15 1269.5,2218 1269.5,2219.75 1276.5,2219.75 1276.5,2218 1276.5,2204.15 1283.5,2204.15 1283.5,2218 1283.5,2219.75 1290.5,2219.75 1290.5,2218 1290.5,2204.15 1297.5,2204.15 1297.5,2218 1297.5,2219.75 1304.5,2219.75 1304.5,2218 1304.5,2204.15 1311.5,2204.15 1311.5,2218 1311.5,2219.75 1318.5,2219.75 1318.5,2218 1325.5,2218 1329,2218 1459,2088 1459,1773 v1(1386,1700)
ADDR3-D7: U1.E1 U6.E3 | length 1981.5
  Top Layer w3.5: U6.E3@1106.24,2046.99 v1(1121.99,2062.74) ; U1.E1@1143.85,1512.85 1143.85,1528.05 1258.8,1643 1271,1643 v1(1350,1722)
  Bottom Layer w3.5: v1(1121.99,2062.74) 1121.99,2139 1137.49,2154.51 1277.49,2154.51 1300,2132 1303.5,2132 1310.5,2132 1310.5,2073.95 1317.5,2073.95 1317.5,2132 1317.5,2181.56 1324.5,2181.56 1324.5,2132 1324.5,2063.25 1331.5,2063.25 1331.5,2132 1338.5,2132 1344,2132 1346.47,2129.53 1351.42,2124.58 1365.68,2138.83 1370.63,2133.88 1356.37,2119.63 1341.29,2104.54 1346.24,2099.59 1361.32,2114.68 1375.58,2128.93 1380.53,2123.98 1366.27,2109.73 1341.29,2084.74 1346.24,2079.79 1371.22,2104.78 1385.48,2119.03 1390.43,2114.08 1376.17,2099.83 1341.29,2064.95 1346.24,2060 1381.12,2094.88 1395.38,2109.13 1400.33,2104.18 1386.07,2089.93 1342.77,2046.62 1347.72,2041.67 1391.02,2084.98 1405.28,2099.23 1410.23,2094.28 1395.97,2080.03 1400.92,2075.08 1401,2075 1401,1773 v1(1350,1722)
ADDR3-D8: U1.E2 U6.C2 | length 1135.9
  Top Layer w3.5: U1.E2@1143.85,1481.35 1160,1497.5 1160,1534 1209,1583 1257,1583 1275,1601 v1(1275,1604) ; U6.C2@1169,2078 1184.75,2093.75 1263,2093.75 1266.5,2093.75 1266.5,2139.26 1273.5,2139.26 1273.5,2093.75 1282,2093.75 1402.25,2093.75 1468,2028 1468,1864 1273,1669 v1(1272,1669)
  Bottom Layer w3.5: v1(1272,1669) 1273.5,1667.5 1273.5,1605.5 v1(1275,1604)
ADDR3-D9: U1.E3 U6.A2 | length 1135.4
  Top Layer w3.5: v1(1120,1651) 1120,1671 1175,1726 1300.9,1726 1446,1871.1 1446,2023 1390.51,2078.49 1339,2078.49 1327.5,2078.49 1327.5,2073.45 1320.5,2073.45 1320.5,2078.49 1320.5,2083.05 1313.5,2083.05 1313.5,2078.49 1313.5,2073.45 1306.5,2073.45 1306.5,2078.49 1306.5,2083.05 1299.5,2083.05 1299.5,2078.49 1299.5,2073.45 1292.5,2073.45 1292.5,2078.49 1292.5,2083.05 1285.5,2083.05 1285.5,2078.49 1285.5,2073.45 1278.5,2073.45 1278.5,2078.49 1278.5,2083.05 1271.5,2083.05 1271.5,2078.49 1271.5,2073.45 1264.5,2073.45 1264.5,2078.49 1264.5,2083.05 1257.5,2083.05 1257.5,2078.49 1254,2078.49 U6.A2@1232.22,2078.49 ; v1(1128.1,1465.6) U1.E3@1143.85,1449.85
  Bottom Layer w3.5: v1(1120,1651) 1124,1647 1124,1617 1138.75,1602.25 1138.75,1472.75 1131.6,1465.6 v1(1128.1,1465.6)
ADDR3-D10: U1.G3 U6.C3 | length 1135.5
  Top Layer w3.5: v1(1065.1,1434.1) U1.G3@1080.85,1449.85 ; v1(1105,1668) 1105,1673 1165,1733 1298,1733 1422,1857 1422,2017 1376.25,2062.75 1184.75,2062.75 U6.C3@1169,2047
  Bottom Layer w3.5: v1(1065.1,1434.1) 1070.1,1434.1 1085,1449 1101.35,1449 1111.45,1459.1 1111.45,1489.55 1095,1506 1095,1568 1104,1577 1104,1667 v1(1105,1668)
ADDR3-D11: U1.H3 U6.A3 | length 1134.4
  Top Layer w3.5: U1.H3@1049.35,1449.85 v1(1065.1,1465.6) ; v1@1079,1627 1079,1665 1154,1740 1294,1740 1401,1847 1401,1999 1353.01,2046.99 1311,2046.99 1305.5,2046.99 1305.5,2027.68 1298.5,2027.68 1298.5,2046.99 1298.5,2048.74 1291.5,2048.74 1291.5,2046.99 1291.5,2027.68 1284.5,2027.68 1284.5,2046.99 1284.5,2048.74 1277.5,2048.74 1277.5,2046.99 1277.5,2027.68 1270.5,2027.68 1270.5,2046.99 1270.5,2048.74 1263.5,2048.74 1263.5,2046.99 1263.5,2027.68 1256.5,2027.68 1256.5,2046.99 1256.5,2048.74 1249.5,2048.74 1249.5,2046.99 1246,2046.99 U6.A3@1232.22,2046.99
  Bottom Layer w3.5: v1(1065.1,1465.6) 1065.1,1571.1 1080,1586 v1(1080,1627)
ADDR3-D12: U1.J3 U6.A7 | length 1135.4
  Top Layer w3.5: U1.J3@1017.85,1449.85 v1(1033.6,1465.6) ; v1(1042,1549) 1039,1552 1039,1626 1055,1642 1055,1664.9 1144.1,1754 1268,1754 1355,1841 1355,1943 1322,1976 1312.5,1976 1312.5,1957.91 1305.5,1957.91 1305.5,1976 1305.5,1982.09 1298.5,1982.09 1298.5,1976 1298.5,1957.91 1291.5,1957.91 1291.5,1976 1291.5,1982.09 1284.5,1982.09 1284.5,1976 1284.5,1957.91 1277.5,1957.91 1277.5,1976 1277.5,1982.09 1270.5,1982.09 1270.5,1976 1270.5,1957.74 1263.5,1957.74 1263.5,1976 1256.5,1976 1253,1976 1249.54,1972.54 1244.59,1967.59 1225.44,1986.75 1220.49,1981.8 1239.65,1962.65 1234.7,1957.7 1232.22,1955.22 1232.22,1948.61 1232.22,1941.61 1232.22,1938.11 U6.A7@1232.22,1921.01
  Bottom Layer w3.5: v1(1033.6,1465.6) 1055,1487 1055,1532 1040,1547 v1(1042,1549)
ADDR3-D13: U1.H2 U6.D7 | length 1194.6
  Top Layer w3.5: U1.H2@1049.35,1481.35 1054.35,1481.35 1065,1492 1065,1533.08 1056.25,1541.83 1056.25,1557 1047,1566.25 1047,1617 1062,1632 1062,1662 1147,1747 1289,1747 1376,1834 1376,1973 1344,2005 1170,2005 1155.06,1990.06 1168.8,1976.31 1163.85,1971.36 1150.11,1985.11 1132.92,2002.29 1127.97,1997.34 1145.16,1980.16 1140.21,1975.21 1137.73,1972.73 1137.73,1972.5 1137.73,1965.5 1147.36,1965.5 1147.36,1958.5 1137.73,1958.5 1129.4,1958.5 1129.4,1951.5 1137.73,1951.5 1144.38,1951.5 1144.38,1944.5 1137.73,1944.5 1131.09,1944.5 1131.09,1937.5 1137.73,1937.5 1137.73,1934 U6.D7@1137.73,1921.01
ADDR3-D14: U1.H1 U6.C8 | length 1195.2
  Top Layer w3.5: U1.H1@1049.35,1512.85 1049.35,1517.65 1027,1540 1027,1623.9 1048,1644.9 1048,1667.8 1141.2,1761 1247,1761 1340,1854 1340,1926 1340,1927 1339.42,1927.58 1334.47,1932.53 1332,1935 1331.5,1935 1324.5,1935 1324.5,1893.19 1317.5,1893.19 1317.5,1935 1317.5,1949.59 1310.5,1949.59 1310.5,1935 1310.5,1904.32 1303.5,1904.32 1303.5,1935 1303.5,1949.59 1296.5,1949.59 1296.5,1935 1296.5,1911.26 1289.5,1911.26 1289.5,1935 1289.5,1949.59 1282.5,1949.59 1282.5,1935 1275.5,1935 1272,1935 1268.22,1931.22 1263.27,1926.27 1286.39,1903.15 1281.44,1898.2 1258.32,1921.32 1250.59,1929.06 1245.64,1924.11 1253.37,1916.37 1260.44,1909.31 1255.49,1904.36 1248.42,1911.42 1243.47,1906.47 1241,1904 1236.5,1904 1233,1904 1186,1904 1171.51,1889.51 U6.C8@1169.23,1889.51
ADDR3-D15: U1.J1 U6.B8 | length 1193.8
  Top Layer w3.5: U1.J1@1017.85,1512.85 1017.85,1624.65 1041,1647.8 1041,1670.7 1138.3,1768 1141.8,1768 1148.8,1768 1155.8,1768 1155.8,1812.89 1162.8,1812.89 1162.8,1768 1169.8,1768 1169.8,1811.37 1176.8,1811.37 1176.8,1768 1183.8,1768 1183.8,1815.38 1190.8,1815.38 1190.8,1768 1197.8,1768 1197.8,1811.36 1204.8,1811.36 1204.8,1768 1211.8,1768 1218.8,1768 1223,1768 1225.47,1770.47 1230.42,1775.42 1218.97,1786.88 1223.92,1791.83 1235.37,1780.37 1238.76,1776.99 1243.71,1781.94 1240.32,1785.32 1218.97,1806.68 1223.92,1811.63 1245.27,1790.27 1248.66,1786.89 1253.61,1791.84 1250.22,1795.22 1235.99,1809.46 1240.94,1814.41 1255.17,1800.17 1271.5,1816.5 1320,1865 1320,1879.47 1304.47,1895 1304.47,1896 1291,1896 1269,1874 1216.24,1874 U6.B8@1200.72,1889.51
ADDR3-DM0: U1.A1 U6.E7 | length 1981.5
  Top Layer w3.5: U6.E7@1106.24,1921.01 v1(1106.24,1944.76) ; U1.A1@1269.85,1512.85 v1(1269.85,1535.15)
  Bottom Layer w3.5: v1(1106.24,1944.76) 1108.71,1942.29 1113.66,1937.34 1118.61,1932.39 1197.15,2010.93 1202.1,2005.98 1123.56,1927.44 1110.01,1913.89 1114.96,1908.94 1128.51,1922.49 1152.59,1946.57 1157.54,1941.62 1133.46,1917.54 1138.41,1912.59 1141,1910 1141,1906.5 1141,1899.5 1127.48,1899.5 1127.48,1892.5 1141,1892.5 1198.18,1892.5 1198.18,1885.5 1141,1885.5 1127.48,1885.5 1127.48,1878.5 1141,1878.5 1141,1871.5 1141,1868 1143.47,1865.53 1148.42,1860.58 1166.35,1878.5 1171.3,1873.55 1153.37,1855.63 1158.32,1850.68 1161,1848 1161,1844.5 1161,1837.5 1151.98,1837.5 1151.98,1830.5 1161,1830.5 1218.97,1830.5 1218.97,1823.5 1161,1823.5 1145.02,1823.5 1145.02,1816.5 1161,1816.5 1182.79,1816.5 1182.79,1809.5 1161,1809.5 1138.4,1809.5 1138.4,1802.5 1161,1802.5 1176.3,1802.5 1176.3,1795.5 1161,1795.5 1161,1788.5 1161,1782 1163.47,1779.53 1168.42,1774.58 1173.37,1769.63 1180.88,1777.13 1185.83,1772.18 1178.32,1764.68 1183.27,1759.73 1185,1758 1185,1754.5 1185,1747.5 1180,1747.5 1180,1740.5 1185,1740.5 1195.46,1740.5 1195.46,1733.5 1185,1733.5 1180,1733.5 1180,1726.5 1185,1726.5 1197.49,1726.5 1197.49,1719.5 1185,1719.5 1180,1719.5 1180,1712.5 1185,1712.5 1185,1709 1185,1699 1187.25,1696.75 1187.25,1673.25 1176,1662 1176,1629 1195,1610 1219.43,1585.57 1248.64,1614.79 1253.59,1609.84 1224.38,1580.62 1187.91,1544.16 1192.86,1539.21 1229.33,1575.67 1244.05,1590.4 1249,1585.45 1234.28,1570.72 1187.91,1524.36 1192.86,1519.41 1239.23,1565.77 1253.31,1579.86 1258.26,1574.91 1244.18,1560.82 1242.94,1559.59 1247.89,1554.64 1249.13,1555.87 1289.14,1595.89 1294.09,1590.94 1254.08,1550.92 1252.84,1549.69 1257.79,1544.74 1259.03,1545.97 1261.5,1543.5 v1(1269.85,1535.15)
ADDR3-DM1: U1.F1 U6.D3 | length 1076.7
  Top Layer w3.5: v1(1093,1967) 1093,1969.77 1093,1976.77 1093,1983.77 1093,1987.27 1095.66,1989.93 1100.61,1994.88 1083.26,2012.23 1088.21,2017.18 1105.56,1999.83 1130.24,1975.14 1135.19,1980.09 1110.51,2004.78 1097.34,2017.94 1102.29,2022.89 1115.46,2009.73 1122.96,2002.23 1127.91,2007.18 1120.41,2014.68 1105.48,2029.61 1110.43,2034.56 1125.36,2019.63 1137.02,2007.97 1141.97,2012.92 1130.31,2024.58 1135.26,2029.53 1137.73,2032 1137.73,2036.49 1137.73,2043.49 U6.D3@1137.73,2046.99 ; U1.F1@1112.35,1512.85 v1(1112.35,1537) ; v1(1121,1594) 1163.5,1636.5 1163.5,1671 1173,1680.5 v1(1173,1687.59)
  Bottom Layer w3.5: v1(1093,1967) 1091.99,1965.99 1091.99,1922.01 1120.49,1893.51 1120.49,1810.51 1158,1773 1160.63,1770.37 1145.45,1755.2 1150.4,1750.25 1165.58,1765.42 1170.53,1760.47 1173,1758 1173,1756.5 1173,1749.5 1173,1742.5 1132.47,1742.5 1132.47,1735.5 1173,1735.5 1173,1728.5 1146.47,1728.5 1146.47,1721.5 1173,1721.5 1173,1714.5 1160.47,1714.5 1160.47,1707.5 1173,1707.5 1173,1704 v1(1173,1687.59) v1@1173,1684 ; v1(1112.35,1537) 1112.35,1537.35 1129,1554 1129,1586 v1(1121,1594)
ADDR3-DQS0_N: U1.B2 U6.G3 | length 1954.4
  Top Layer w3.5: U6.G3@1043.24,2046.99 v1(1058.99,2031.24) ; U1.B2@1238.35,1481.35 v1(1252,1495)
  Bottom Layer w3.5: v1(1058.99,2031.24) 1061.77,2028.47 1069.01,2028.47 1071.24,2026.24 1071.24,2020.44 1084.61,2007.07 1137.66,2007.07 1147.34,2016.75 1154.77,2024.18 1169.34,2009.62 ccw(c1171.81,2012.09) 1174.29,2009.62 1184.18,2019.51 ccw(c1181.71,2021.99) 1185.21,2021.99 ccw(c1181.71,2021.99) 1184.18,2024.47 1167.15,2041.51 1146.51,2062.14 1151.46,2067.09 1172.09,2046.46 ccw(c1174.57,2048.93) 1177.05,2046.46 1186.59,2056 1211.39,2056 ccw(c1211.39,2059.5) 1214.89,2059.5 1214.89,2109.73 1221.89,2109.73 1221.89,1902.58 ccw(c1225.39,1902.58) 1225.39,1899.08 1239.39,1899.08 ccw(c1239.39,1902.58) 1242.89,1902.58 1242.89,2109.88 1249.89,2109.88 1249.89,1909.9 ccw(c1253.39,1909.9) 1253.39,1906.4 1267.39,1906.4 ccw(c1267.39,1909.9) 1270.89,1909.9 1270.89,2056 1308,2056 1374.97,1989.03 1374.97,1901.64 1380.1,1896.51 1380.1,1815.1 1373.95,1808.95 1373.95,1806.05 1314,1746.1 1314,1522 1272.82,1480.82 1258.99,1480.82 1258.91,1480.75 1246.1,1480.75 1240.8,1486.05 1240.8,1488.95 1242.85,1491 1244.07,1491 1248.08,1495 v1(1252,1495)
ADDR3-DQS0_P: U1.C2 U6.F3 | length 1984.8
  Top Layer w3.5: U6.F3@1074.74,2046.99 v1(1090.49,2031.24) ; U1.C2@1209.35,1481.35 U1.C2@1206.85,1481.35 v1(1222.6,1497.1)
  Bottom Layer w3.5: v1(1090.49,2031.24) 1087.72,2028.47 1080.47,2028.47 1078.24,2026.24 1078.24,2023.34 1087.51,2014.07 1134.76,2014.07 1142.39,2021.7 1152.29,2031.6 cw(c1154.77,2029.13) 1157.25,2031.6 1171.81,2017.04 1176.76,2021.99 1162.2,2036.56 1139.09,2059.67 cw(c1141.56,2062.14) 1139.09,2064.62 1148.98,2074.52 cw(c1151.46,2072.04) 1153.94,2074.52 1174.57,2053.88 1183.69,2063 1207.89,2063 1207.89,2113.23 cw(c1211.39,2113.23) 1211.39,2116.73 1225.39,2116.73 cw(c1225.39,2113.23) 1228.89,2113.23 1228.89,1906.08 1235.89,1906.08 1235.89,2113.38 cw(c1239.39,2113.38) 1239.39,2116.88 1253.39,2116.88 cw(c1253.39,2113.38) 1256.89,2113.38 1256.89,1913.4 1263.89,1913.4 1263.89,2059.5 cw(c1267.39,2059.5) 1267.39,2063 1310.9,2063 1383,1990.9 1381.97,1989.87 1381.97,1904.54 1387.1,1899.41 1387.1,1809.3 1321,1743.2 1321,1519.1 1275.72,1473.82 1261.89,1473.82 1261.81,1473.75 1243.2,1473.75 1233.8,1483.15 1233.8,1488.95 1225.65,1497.1 v1(1222.6,1497.1)
ADDR3-DQS1_N: U1.F2 U6.B7 | length 1128
  Top Layer w3.5: U1.F2@1112.35,1481.35 U1.F2@1113.35,1481.35 ; U1.F2@1113,1481 U1.F2@1113.35,1481.35 ; U6.B7@1200.72,1921.01 v1(1200.72,1949.77) ; v1(1217,1641) 1128,1552 1128,1496 U1.F2@1113.35,1481.35
  Bottom Layer w3.5: v1(1200.72,1949.77) 1188.48,1937.52 1188.48,1922 1260,1850.48 1260,1817.3 1338.1,1817.3 cw(c1338.1,1813.8) 1341.6,1813.8 1341.6,1799.8 cw(c1338.1,1799.8) 1338.1,1796.3 1190.3,1796.3 1190.3,1789.3 1310.1,1789.3 cw(c1310.1,1785.8) 1313.6,1785.8 1313.6,1771.8 cw(c1310.1,1771.8) 1310.1,1768.3 1260,1768.3 1260,1744.1 1249.56,1733.66 1273.66,1709.56 cw(c1271.19,1707.08) 1274.69,1707.08 cw(c1271.19,1707.08) 1273.66,1704.6 1263.77,1694.71 cw(c1261.29,1697.18) 1258.81,1694.71 1215.83,1737.69 1210.88,1732.74 1227.29,1716.34 cw(c1224.81,1713.86) 1228.31,1713.86 cw(c1224.81,1713.86) 1227.28,1711.38 1217.39,1701.49 1209.75,1693.85 1209.75,1650.3 1217,1643.05 v1(1217,1641)
ADDR3-DQS1_P: U1.G2 U6.C7 | length 1131.9
  Top Layer w3.5: U1.G2@1080.85,1481.35 1082.35,1481.35 1096,1495 1096,1544 v1(1195.5,1643.5) ; U6.C7@1169.23,1921.01 v1(1169.23,1949.77)
  Bottom Layer w3.5: v1(1169.23,1949.77) 1181.48,1937.52 1181.48,1919.1 1253,1847.58 1253,1813.8 ccw(c1256.5,1813.8) 1256.5,1810.3 1334.6,1810.3 1334.6,1803.3 1186.8,1803.3 ccw(c1186.8,1799.8) 1183.3,1799.8 1183.3,1785.8 ccw(c1186.8,1785.8) 1186.8,1782.3 1306.6,1782.3 1306.6,1775.3 1256.5,1775.3 ccw(c1256.5,1771.8) 1253,1771.8 1253,1747 1242.14,1736.14 ccw(c1244.61,1733.66) 1242.14,1731.18 1266.24,1707.08 1261.29,1702.13 1218.31,1745.11 ccw(c1215.83,1742.64) 1213.35,1745.11 1203.46,1735.22 ccw(c1205.93,1732.74) 1203.46,1730.26 1219.86,1713.86 1212.44,1706.44 1202.75,1696.75 1202.75,1652.8 1195.5,1645.55 v1(1195.5,1643.5)